# EAGLE board untitled1 (1) (EAGLE 9.1.3)
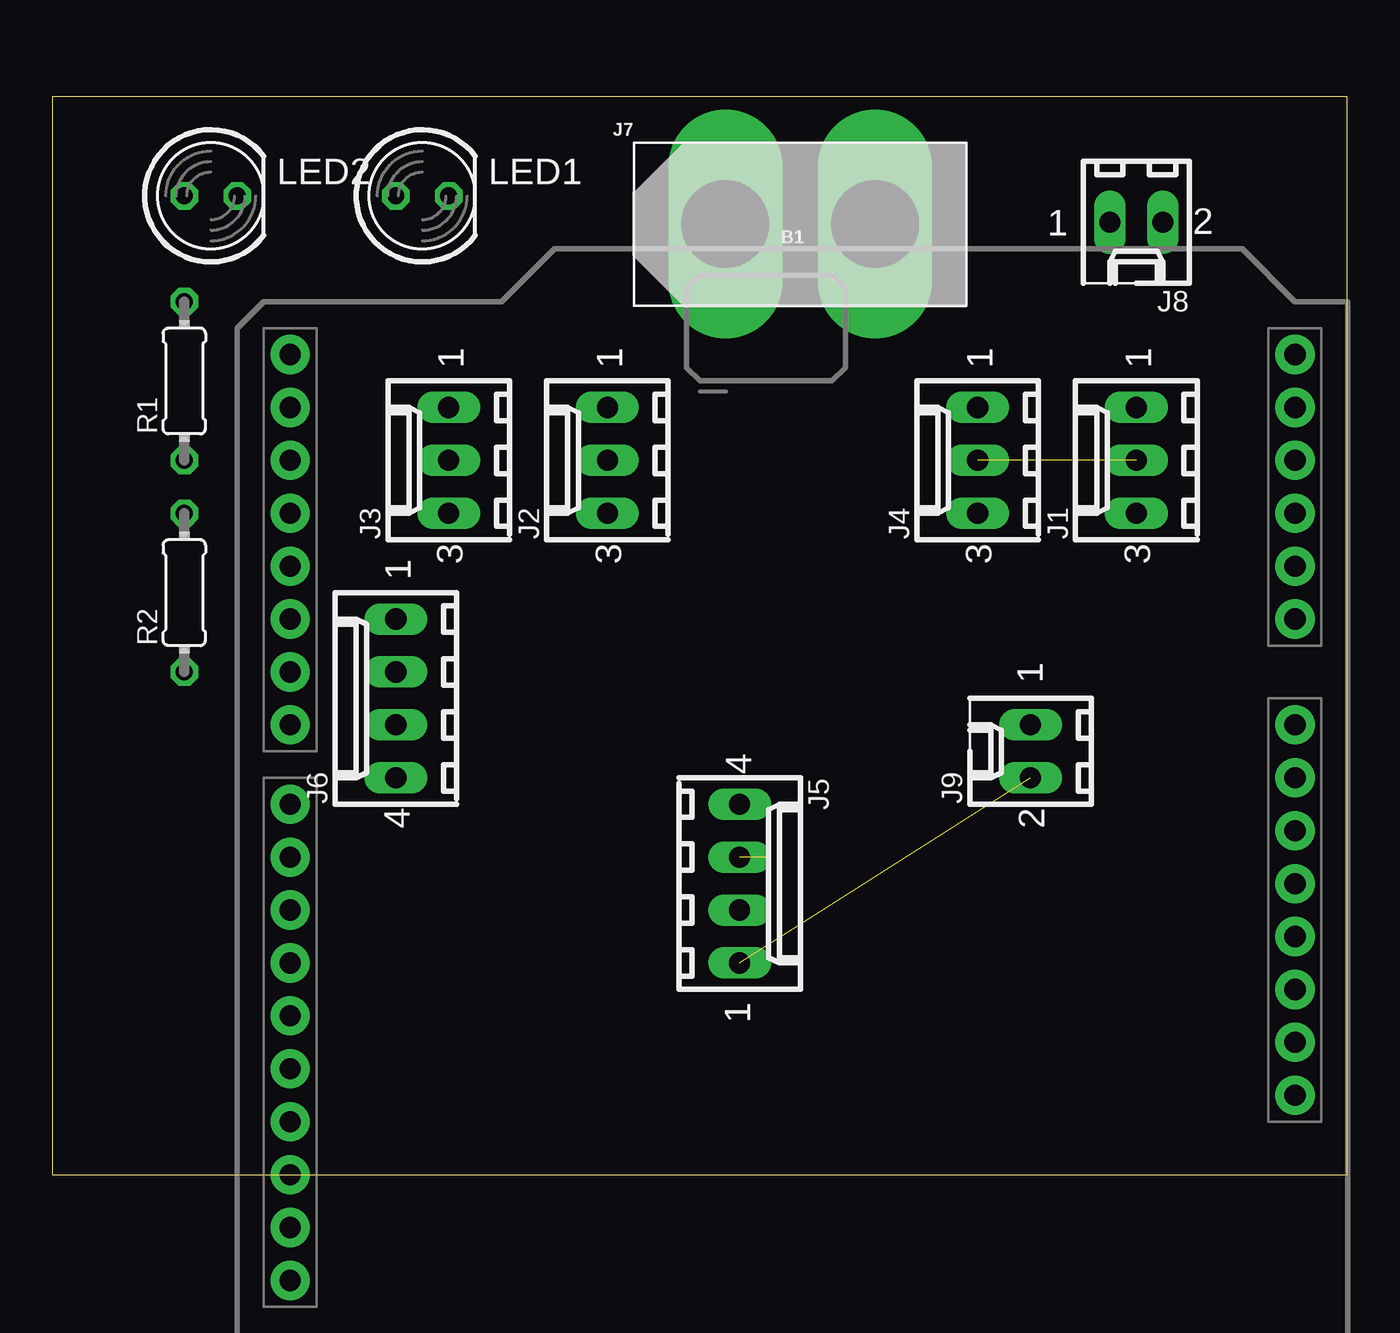
[diagram p0: board, top side]
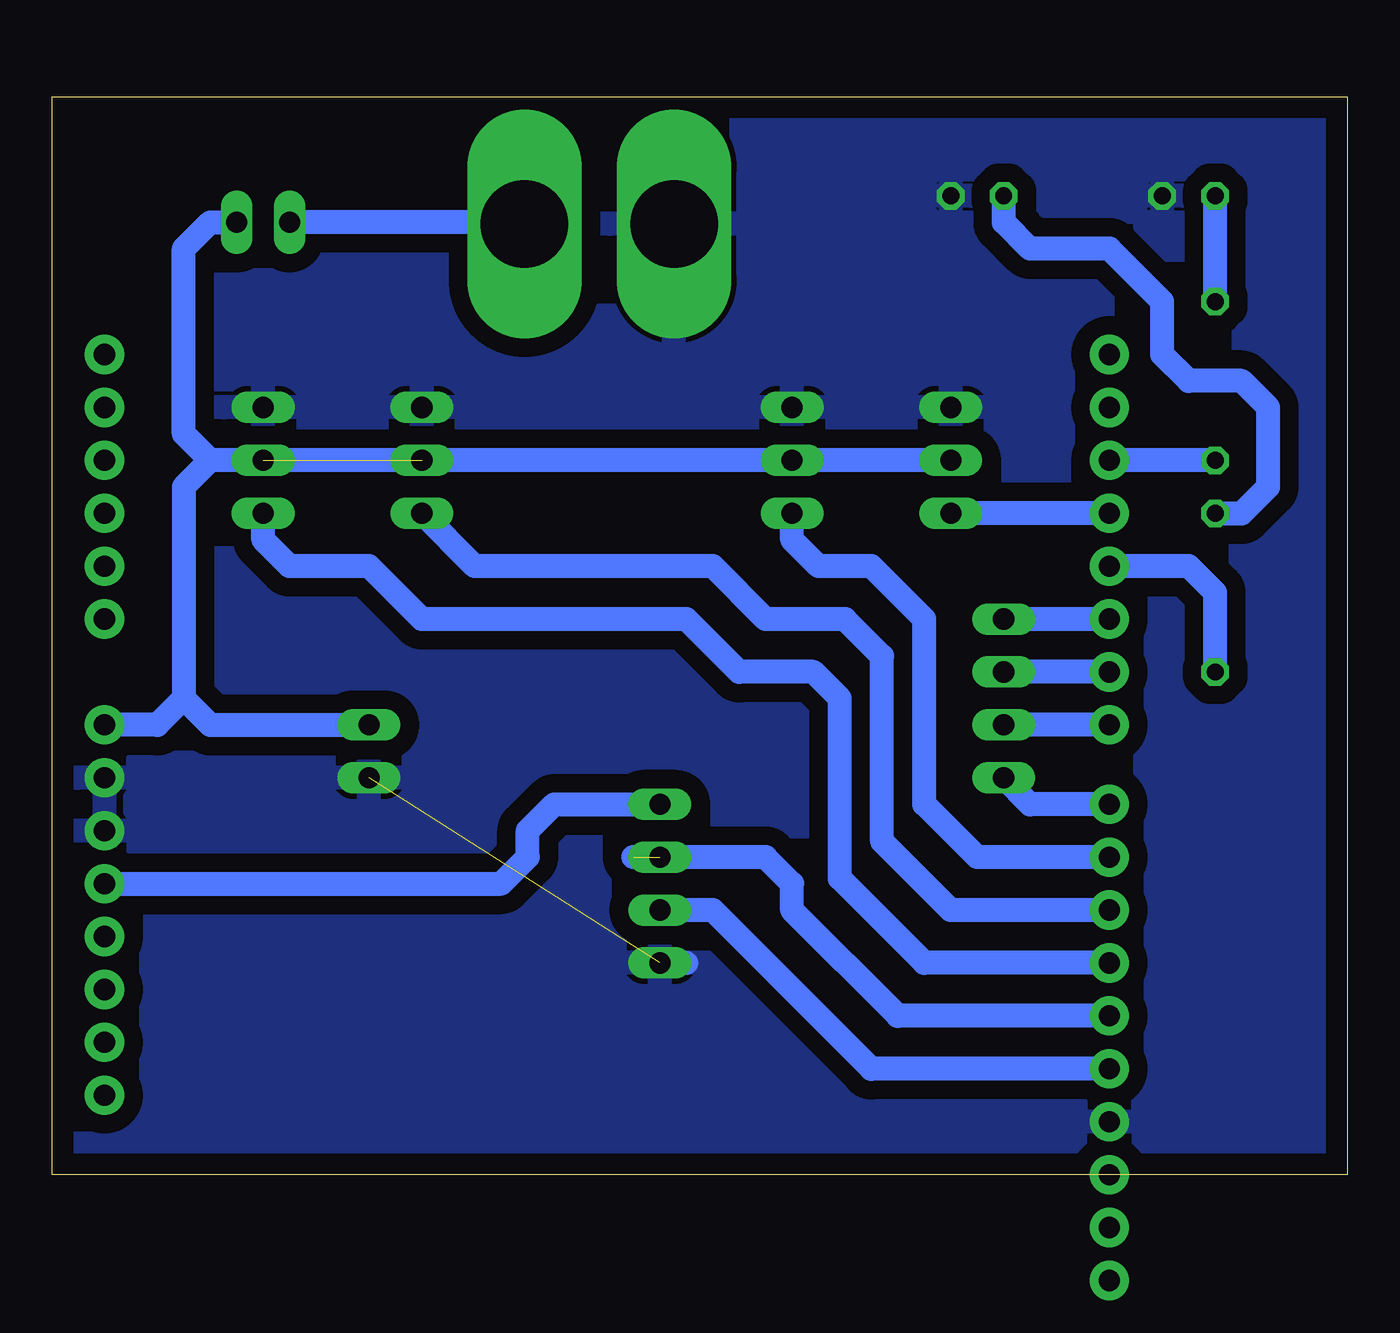
[diagram p1: board, bottom side, seen from below]

Size 62.21 x 51.74 mm. Coordinates in mm from the lower left corner, seen from the top.
Outline: 0,0 62.21,0 62.21,51.74 0,51.74 0,0
Copper layers (1*16): Top 0.035mm / dielectric 1.5mm / Bottom 0.035mm
Design rules "default *": minimum track width 45mil, minimum drill 0.35mm, track to track 35mil, track to pad 35mil, pad to pad 6mil, via to via 6mil, smd to smd 6mil, copper to edge 40mil, drill to drill 6mil, minimum pad ring 10mil, minimum via ring 8mil, stop-mask expansion 4mil, vias tented up to drill 0mil, thermal gap 10mil

## Footprints (pad centres in the part's own frame; a part is rotated, then mirrored left to right if it is on the bottom)
UNO_R3_SHIELD_NOLABELS = drill 1.016 pad 1.88: 3.3V 24.13,-3.81; 5V 24.13,-1.27; A0 24.13,11.43; A1 24.13,13.97; A2 24.13,16.51; A3 24.13,19.05; A4 24.13,21.59; A5 24.13,24.13; AREF -24.13,-15.24; D2 -24.13,19.05; D3 -24.13,16.51; D4 -24.13,13.97; D5 -24.13,11.43; D6 -24.13,8.89; D7 -24.13,6.35; D8 -24.13,2.54; D9 -24.13,0; D10 -24.13,-2.54; D11 -24.13,-5.08; D12 -24.13,-7.62; D13 -24.13,-10.16; GND@0 24.13,1.27; GND@1 24.13,3.81; GND@2 -24.13,-12.7; IOREF 24.13,-8.89; NC 24.13,-11.43; RES 24.13,-6.35; RX -24.13,24.13; SCL -24.13,-20.32; SDA -24.13,-17.78; TX -24.13,21.59; VIN 24.13,6.35
6410-03 = drill 1.016 long: 1 2.54,0; 2 0,0; 3 -2.54,0
6410-04 = drill 1.016 long: 1 3.81,0; 2 1.27,0; 3 -1.27,0; 4 -3.81,0
XT60 = drill 4.2 pad 5.5 long: + 6.51,-1.35; - -0.69,-1.35
6410-02 = drill 1.016 long: 1 1.27,0; 2 -1.27,0
LED5MM = drill 0.813 octagon: A -1.27,0; K 1.27,0
0204/7 = drill 0.813 octagon: 1 -3.81,0; 2 3.81,0

## Placement (x,y rotation side)
B1  ARDUINO_UNO_R3_SHIELDNOLABELS  [UNO_R3_SHIELD_NOLABELS]  35.56,15.24 0 top
J1  CONN_0327-2031  [6410-03]  52.07,34.29 90 top
J2  CONN_0327-2031  [6410-03]  26.67,34.29 90 top
J3  CONN_0327-2031  [6410-03]  19.05,34.29 90 top
J4  CONN_0327-2031  [6410-03]  44.45,34.29 90 top
J5  CONN_0427-2041  [6410-04]  33.02,13.97 270 top
J6  CONN_0427-2041  [6410-04]  16.51,22.86 90 top
J7  [XT60]  33.02,46.99 0 top
J8  CONN_0227-2021  [6410-02]  52.07,45.72 180 top
J9  CONN_0227-2021  [6410-02]  46.99,20.32 90 top
LED1  [LED5MM]  17.78,46.99 0 top
LED2  [LED5MM]  7.62,46.99 0 top
R1  [0204/7]  6.35,38.1 90 top
R2  [0204/7]  6.35,27.94 90 top

## Library data of the parts
B1 = Robotica-IFRN-SC-Arduino
J1-J6 J8 J9 = Robotica-IFRN-SC-conectores; OC_FARNELL: unknown; OC_NEWARK: unknown
J7 = Robotica-IFRN-SC-conectores
LED1 LED2 = led
R1 R2 = rcl; SPICEPREFIX: R

## Nets
GND: B1.GND@0 B1.GND@1 B1.GND@2 J1.1 J2.1 J3.1 J4.1 J5.1 J7.- J9.2 LED1.K LED2.K
N$1: B1.D3 J3.3
N$2: B1.D9 J2.3
N$3: B1.D11 J1.3
N$4: B1.D10 J4.3
N$5: B1.D13 J5.2
N$6: B1.D12 J5.3
N$7: B1.D5 J6.1
N$8: B1.D6 J6.2
N$9: B1.D7 J6.3
N$10: B1.D8 J6.4
N$11: B1.D2 R1.1
N$12: B1.D4 R2.1
N$13: LED2.A R1.2
N$14: LED1.A R2.2
N$15: J7.+ J8.1
N$16: B1.5V J5.4
VCC: B1.VIN J1.2 J2.2 J3.2 J4.2 J8.2 J9.1

## Tracks (layer width: path | path; a pad name or v marks a point on that pad's centre or on a via)
GND  (1 unrouted)
  Bottom 1.143: 31.75,10.16 J5.1
  pour Bottom: 0,52.07 62.23,52.07 62.23,0 0,0
N$1
  Bottom 1.143: B1.D3 J3.3
N$2
  Bottom 1.143: B1.D9 17.78,15.24 20.32,17.78 20.32,26.67 22.86,29.21 25.4,29.21 26.67,30.48 J2.3
N$3
  Bottom 1.143: B1.D11 20.32,10.16 24.38,14.22 24.38,22.86 25.65,24.13 29.21,24.13 31.75,26.67 44.45,26.67 46.99,29.21 50.8,29.21 52.07,30.48 J1.3
N$4
  Bottom 1.143: B1.D10 19.05,12.7 22.35,16 22.35,24.89 24.13,26.67 27.94,26.67 30.48,29.21 41.91,29.21 J4.3
N$5
  Bottom 1.143: B1.D13 22.86,5.08 30.48,12.7 J5.2
N$6  (1 unrouted)
  Bottom 1.143: B1.D12 21.59,7.62 26.67,12.7 26.67,13.97 27.94,15.24 34.29,15.24
N$7
  Bottom 1.143: B1.D5 J6.1
N$8
  Bottom 1.143: B1.D6 J6.2
N$9
  Bottom 1.143: B1.D7 J6.3
N$10
  Bottom 1.143: B1.D8 15.24,17.78 J6.4
N$11
  Bottom 1.143: R1.1 B1.D2
N$12
  Bottom 1.143: R2.1 6.35,27.94 7.62,29.21 B1.D4
N$13
  Bottom 1.143: R1.2 LED2.A
N$14
  Bottom 1.143: R2.2 5.08,31.75 3.81,33.02 3.81,36.83 5.08,38.1 7.62,38.1 8.89,39.37 8.89,41.91 11.43,44.45 15.24,44.45 16.51,45.72 LED1.A
N$15
  Bottom 1.143: J7.+ 39.61,45.72 J8.1
N$16
  Bottom 1.143: B1.5V 40.64,13.97 39.37,15.24 39.37,16.51 38.1,17.78 J5.4
VCC  (1 unrouted)
  Bottom 1.143: J3.2 J2.2 J1.2 54.61,34.29 | 54.61,34.29 55.88,35.56 55.88,44.45 54.61,45.72 J8.2 | 54.61,34.29 55.88,33.02 55.88,22.86 | 55.88,22.86 57.15,21.59 B1.VIN | 55.88,22.86 54.61,21.59 J9.1